# EAGLE board PCU_R2 (EAGLE 7.7.0)
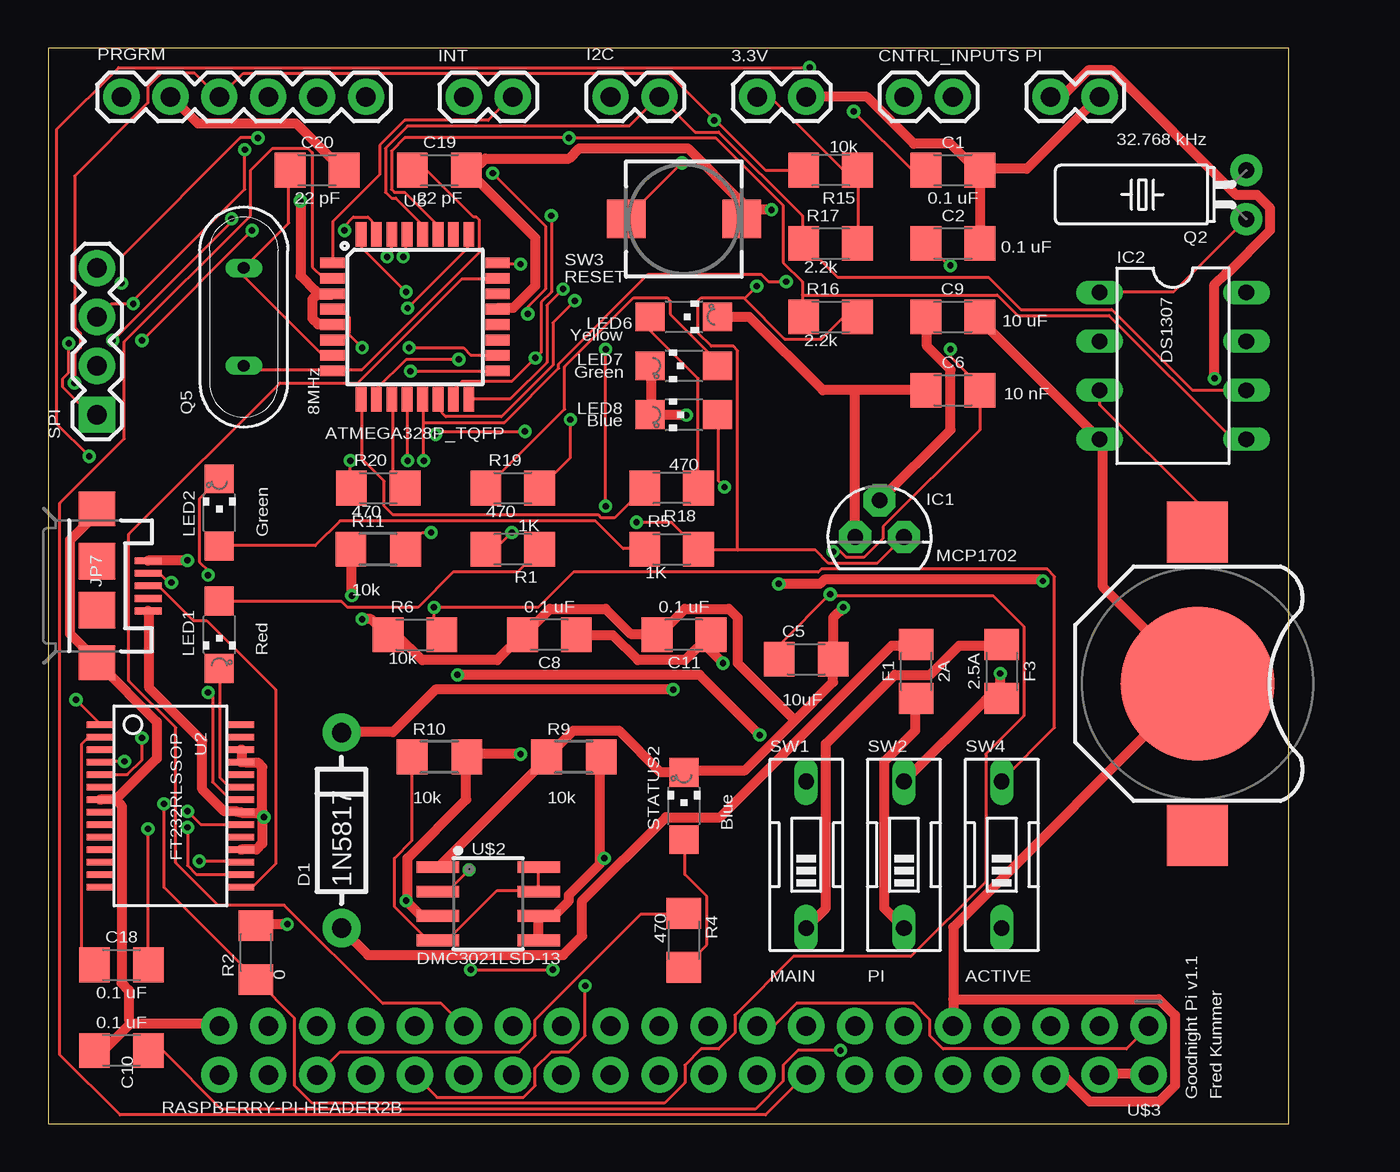
[diagram p0: board, top side]
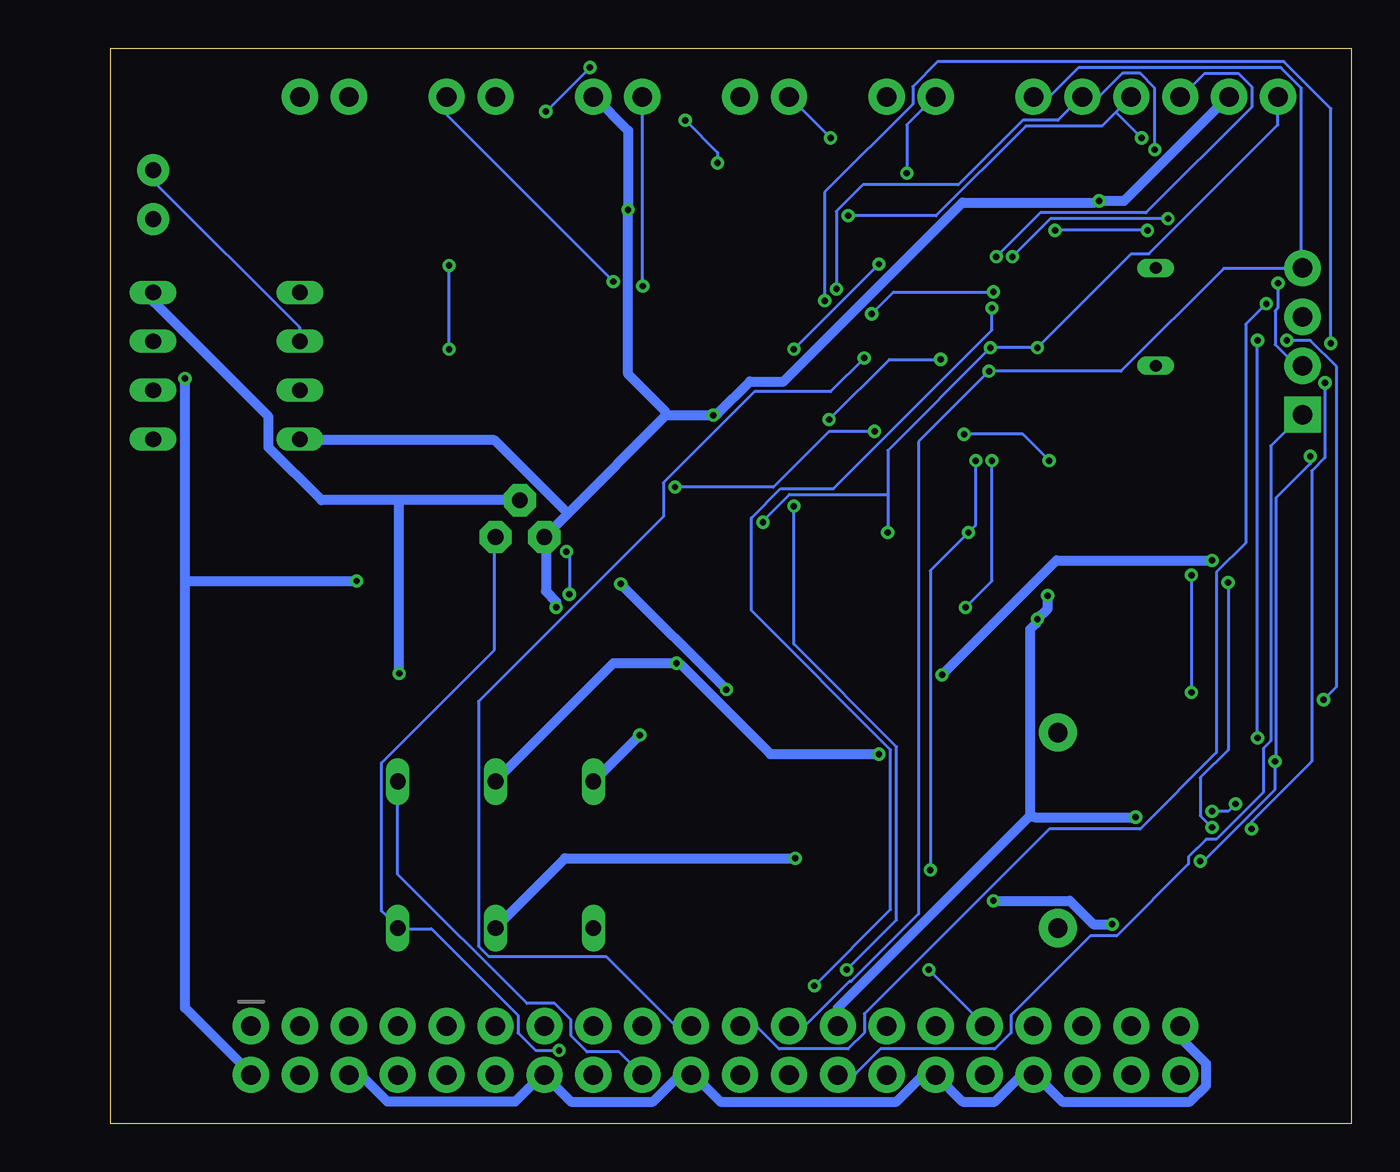
[diagram p1: board, bottom side, seen from below]

Size 64.44 x 55.87 mm. Coordinates in mm from the lower left corner, seen from the top.
Outline: 0,0 64.44,0 64.44,55.87 0,55.87 0,0
Copper layers (1*16): Top 0.0356mm / dielectric 1.5011mm / Bottom 0.0356mm
Design rules "LaenPCBOrder": minimum track width 6mil, minimum drill 13mil, track to track 6mil, track to pad 6mil, pad to pad 6mil, via to via 6mil, smd to smd 6mil, copper to edge 15mil, drill to drill 6mil, minimum pad ring 7mil, minimum via ring 7mil, stop-mask expansion 3mil, vias tented up to drill 0mil, thermal gap 10mil
Net classes: 1 actuator: width 0.813 mm, clearance 0.229 mm; 2 pi: width 0.508 mm

## Footprints (pad centres in the part's own frame; a part is rotated, then mirrored left to right if it is on the bottom)
1X02 = drill 1.016 pad 1.88: 1 0,0; 2 2.54,0
BATTCON_12MM = smd 8 x 8: GND 0,0 | smd 3.175 x 3.175: PWR@1 -7.874,0; PWR@2 7.874,0
1206 = smd 1.6 x 1.8: 1 -1.4,0; 2 1.4,0
C1206 = smd 1.6 x 1.8: 1 -1.4,0; 2 1.4,0
DIODE-1N4001 = drill 1 pad 1.981: A -5.08,0; C 5.08,0
TO92 = drill 0.813 pad 1.676 octagon: 1 -1.27,0; 2 0,1.905; 3 1.27,0
DIL08 = drill 0.813 long: 1 -3.81,-3.81; 2 -1.27,-3.81; 3 1.27,-3.81; 4 3.81,-3.81; 5 3.81,3.81; 6 1.27,3.81; 7 -1.27,3.81; 8 -3.81,3.81
1X04 = drill 1.016 pad 1.88 square: 1 0,0 | drill 1.016 pad 1.88: 2 2.54,0; 3 5.08,0; 4 7.62,0
1X06 = drill 1.016 pad 1.88: 1 0,0; 2 2.54,0; 3 5.08,0; 4 7.62,0; 5 10.16,0; 6 12.7,0
USB-MICROB = smd 0.35 x 1.4: D+ 0,2.65; D- -0.65,2.65; GND 1.3,2.65; ID 0.65,2.65; VBUS -1.3,2.65 | smd 1.8 x 1.9: MT1 -4,0; MT2 4,0 | smd 1.9 x 1.9: P$1 -1.27,0; P$2 1.27,0
CHIPLED_1206 = smd 1.5 x 1.5: A 0,-1.75; C 0,1.75
TC38H = drill 0.813 pad 1.676: 1 -1.27,0; 2 1.27,0
QS = drill 0.61 long: 1 -2.54,0; 2 2.54,0
R1206 = smd 1.6 x 1.803: 1 -1.422,0; 2 1.422,0
EDG-01 = drill 0.813 long: 1 0,-3.81; 2 0,3.81
PUSHBUTTON_SMD_SJ = smd 2 x 2: P$1 3,0; P$2 -3,0
SSOP28DB = smd 0.348 x 1.397: 1 -4.225,-3.656; 2 -3.575,-3.656; 3 -2.925,-3.656; 4 -2.275,-3.656; 5 -1.625,-3.656; 6 -0.975,-3.656; 7 -0.325,-3.656; 8 0.325,-3.656; 9 0.975,-3.656; 10 1.625,-3.656; 11 2.275,-3.656; 12 2.925,-3.656; 13 3.575,-3.656; 14 4.225,-3.656; 15 4.225,3.656; 16 3.575,3.656; 17 2.925,3.656; 18 2.275,3.656; 19 1.625,3.656; 20 0.975,3.656; 21 0.325,3.656; 22 -0.325,3.656; 23 -0.975,3.656; 24 -1.625,3.656; 25 -2.275,3.656; 26 -2.925,3.656; 27 -3.575,3.656; 28 -4.225,3.656
TQFP32-08 = smd 1.27 x 0.559: 1 -4.293,2.8; 2 -4.293,2; 3 -4.293,1.2; 4 -4.293,0.4; 5 -4.293,-0.4; 6 -4.293,-1.2; 7 -4.293,-2; 8 -4.293,-2.8; 17 4.293,-2.8; 18 4.293,-2; 19 4.293,-1.2; 20 4.293,-0.4; 21 4.293,0.4; 22 4.293,1.2; 23 4.293,2; 24 4.293,2.8 | smd 0.559 x 1.27: 9 -2.8,-4.293; 10 -2,-4.293; 11 -1.2,-4.293; 12 -0.4,-4.293; 13 0.4,-4.293; 14 1.2,-4.293; 15 2,-4.293; 16 2.8,-4.293; 25 2.8,4.293; 26 2,4.293; 27 1.2,4.293; 28 0.4,4.293; 29 -0.4,4.293; 30 -1.2,4.293; 31 -2,4.293; 32 -2.8,4.293
SOIC-8 = smd 0.61 x 2.21: 1 -1.905,-2.616; 2 -0.635,-2.616; 3 0.635,-2.616; 4 1.905,-2.616; 5 1.905,2.616; 6 0.635,2.616; 7 -0.635,2.616; 8 -1.905,2.616
2X20-NOSILK = drill 1.016 pad 1.88: 1 0,0; 2 0,2.54; 3 2.54,0; 4 2.54,2.54; 5 5.08,0; 6 5.08,2.54; 7 7.62,0; 8 7.62,2.54; 9 10.16,0; 10 10.16,2.54; 11 12.7,0; 12 12.7,2.54; 13 15.24,0; 14 15.24,2.54; 15 17.78,0; 16 17.78,2.54; 17 20.32,0; 18 20.32,2.54; 19 22.86,0; 20 22.86,2.54; 21 25.4,0; 22 25.4,2.54; 23 27.94,0; 24 27.94,2.54; 25 30.48,0; 26 30.48,2.54; 27 33.02,0; 28 33.02,2.54; 29 35.56,0; 30 35.56,2.54; 31 38.1,0; 32 38.1,2.54; 33 40.64,0; 34 40.64,2.54; 35 43.18,0; 36 43.18,2.54; 37 45.72,0; 38 45.72,2.54; 39 48.26,0; 40 48.26,2.54

## Placement (x,y rotation side)
3.3V  [1X02]  36.83,53.34 0 top
BAT1  [BATTCON_12MM]  59.69,22.86 270 top
C1  0.1 uF  [1206]  46.99,49.53 0 top
C2  0.1 uF  [1206]  46.99,45.72 0 top
C5  10uF  [C1206]  39.37,24.13 0 top
C6  10 nF  [1206]  46.99,38.1 0 top
C8  0.1 uF  [1206]  26.04,25.4 180 top
C9  10 uF  [C1206]  46.99,41.91 0 top
C10  0.1 uF  [1206]  3.81,3.81 180 top
C11  0.1 uF  [1206]  33.02,25.4 180 top
C18  0.1 uF  [1206]  3.81,8.26 0 top
C19  22 pF  [1206]  20.32,49.53 0 top
C20  22 pF  [1206]  13.97,49.53 0 top
CNTRL_INPUTS  [1X02]  44.45,53.34 0 top
D1  1N5817  [DIODE-1N4001]  15.24,15.24 90 top
F1  2A  [1206]  45.09,23.5 90 top
F3  2.5A  [1206]  49.53,23.5 270 top
IC1  MCP1702  [TO92]  43.18,30.48 0 top
IC2  DS1307  [DIL08]  58.42,39.37 270 top
INT  [1X02]  21.59,53.34 0 top
JP2  SPI  [1X04]  2.54,36.83 90 top
JP6  PRGRM  [1X06]  3.81,53.34 0 top
JP7  USB-MICROB  [USB-MICROB]  2.54,27.94 270 top
JP9  I2C  [1X02]  29.21,53.34 0 top
LED1  Red  [CHIPLED_1206]  8.89,25.4 180 top
LED2  Green  [CHIPLED_1206]  8.89,31.75 0 top
LED6  Green  [CHIPLED_1206]  33.02,41.91 270 top
LED7  Yellow  [CHIPLED_1206]  33.02,39.37 90 top
LED8  Blue  [CHIPLED_1206]  33.02,36.83 90 top
PI  [1X02]  52.07,53.34 0 top
Q2  32.768 kHz  [TC38H]  62.23,48.26 90 top
Q5  8MHz  [QS]  10.16,41.91 90 top
R1  1K  [1206]  24.13,29.84 180 top
R2  0  [1206]  10.79,8.89 90 top
R4  470  [1206]  33.02,9.53 270 top
R5  1K  [1206]  32.38,29.84 0 top
R6  10k  [1206]  19.05,25.4 0 top
R9  10k  [R1206]  27.3,19.05 0 top
R10  10k  [R1206]  20.32,19.05 0 top
R11  10k  [R1206]  17.14,29.84 0 top
R15  10k  [1206]  40.64,49.53 180 top
R16  2.2k  [1206]  40.64,41.91 0 top
R17  2.2k  [1206]  40.64,45.72 0 top
R18  470  [1206]  32.38,33.02 180 top
R19  470  [1206]  24.13,33.02 0 top
R20  470  [1206]  17.14,33.02 0 top
STATUS2  Blue  [CHIPLED_1206]  33.02,16.51 0 top
SW1  MAIN  [EDG-01]  39.37,13.97 0 top
SW2  PI  [EDG-01]  44.45,13.97 0 top
SW3  RESET  [PUSHBUTTON_SMD_SJ]  33.02,46.99 0 top
SW4  ACTIVE  [EDG-01]  49.53,13.97 0 top
U2  FT232RLSSOP  [SSOP28DB]  6.35,16.51 270 top
U5  ATMEGA328P_TQFP  [TQFP32-08]  19.05,41.91 0 top
U$2  DMC3021LSD-13  [SOIC-8]  22.86,11.43 270 top
U$3  RASPBERRY-PI-HEADER2B  [2X20-NOSILK]  57.15,5.08 180 top

## Library data of the parts
3.3V CNTRL_INPUTS INT JP2 JP9 PI = SparkFun-Connectors
BAT1 = SparkFun-Electromechanical; PROD_ID: BATT-08044
C1 C2 C6 C8 C10 C11 C18-C20 = SparkFun-Capacitors; PROD_ID: CAP-09822
C5 C9 IC1 IC2 LED1 LED2 LED6-LED8 R9-R11 STATUS2 SW3 = adafruit
D1 = SparkFun-DiscreteSemi
F1 F3 = SparkFun-Fuses; PROD_ID: RES-08585
JP6 = SparkFun-Connectors; PROD_ID: CONN-08437
JP7 = SparkFun-Connectors; PROD_ID: CONN-09505
Q2 = adafruit; OC_FARNELL: unknown; OC_NEWARK: unknown
Q5 SW1 SW2 SW4 = special
R1 R2 R5 = SparkFun-Resistors
R4 R6 R15-R20 = SparkFun-Passives
U2 = SparkFun
U5 = SparkFun-IC-Microcontroller; PROD_ID: IC-09069
U$2 U$3 = custom

## Nets
3.3V: 3.3V.1 C10.1 IC1.3 JP6.1 R1.2 R5.2 R15.1 R16.2 R17.2 SW4.1 U5.4 U5.6 U5.18
5V [pi]: C8.1 C9.1 C11.1 F3.2 IC1.2 IC2.8 R2.2 R10.2 SW2.2 U$2.3
5V_RAW [pi]: JP7.VBUS SW1.2
5V_SWITCH [pi]: F3.1 SW1.1
A0: U5.23 U$3.29
A1: U5.24 U$3.31
A2: U5.25 U$3.32
ACTIVE: R6.2 SW4.2 U5.12 U$3.18
ALIVE: U5.2 U$3.16
D+: JP7.D+ U2.15
D-: JP7.D- U2.16
DTR: C18.1 U2.2
FT232_VCC: C2.1 C5.1 C6.2 R2.1 U2.20
FUSE_DIODE_PI [pi]: D1.A F1.2
GND-ISO [pi]: 3.3V.2 BAT1.GND C1.2 C2.2 C5.2 C6.1 C8.2 C9.2 C10.2 C11.2 C19.2 C20.2 IC1.1 IC2.4 JP6.2 JP7.GND JP7.MT1 JP7.MT2 LED6.C LED7.C LED8.C PI.2 R6.1 R9.1 R11.1 STATUS2.C SW3.P$1 U2.7 U2.18 U2.21 U2.25 U2.26 U5.3 U5.5 U5.21 U$2.1 U$3.6 U$3.9 U$3.14 U$3.20 U$3.25 U$3.30 U$3.34 U$3.39
GP16: R4.1 U$3.36
INT0: INT.1 U5.32
INT1: INT.2 U5.1
MISO: JP2.3 JP6.5 U5.16 U$3.21
MOSI: JP2.2 JP6.4 U5.15 U$3.19
N$1: LED1.A R1.1
N$2: LED2.A R5.1
N$3: IC2.1 Q2.1
N$4: IC2.2 Q2.2
N$5: BAT1.PWR@1 IC2.3
N$10: R4.2 STATUS2.A
N$25: LED6.A R18.1
N$26: LED7.A R19.1
N$27: LED8.A R20.1
PD5: R18.2 U5.9
PD6: R19.2 U5.10
PD7: R20.2 U5.11
PI_3.3V: U$3.1 U$3.17
PI_5V [pi]: D1.C PI.1 U$3.2 U$3.4
PI_N_DRAIN: R10.1 U$2.4 U$2.7 U$2.8
PI_P_DRAIN [pi]: F1.1 R9.2 SW2.1 U$2.5 U$2.6
PI_PWR_CNTRL: CNTRL_INPUTS.2 R11.2 U5.13 U$2.2
RESET: C18.2 JP6.3 R15.2 SW3.P$2 U5.29
RXI: U2.5 U5.31
RXLED: LED2.C U2.22
SCL: IC2.6 JP9.2 R17.1 U5.28
SCLK: JP2.4 JP6.6 U5.17 U$3.23
SDA: IC2.5 JP9.1 R16.1 U5.27
SS: JP2.1 U5.14 U$3.26
TXLED: LED1.C U2.23
TXO: U2.1 U5.30
VCCIO: C1.1 U2.4 U2.17
XTAL1: C20.1 Q5.2 U5.7
XTAL2: C19.1 Q5.1 U5.8

## Tracks (layer width: path | path; a pad name or v marks a point on that pad's centre or on a via)
3.3V  (via drill 0.33)
  Top 0.152: 15.58,41.03 15.62,41.07 15.62,41.91 15.24,42.29 14.78,42.29 U5.4 | 15.58,41.03 15.32,40.77 14.78,40.77 U5.6 | v18.75,40.31 21.57,40.31 21.95,39.93 23.32,39.93 U5.18 | 15.58,41.03 v16.31,40.31 | v24.08,30.71 23.24,29.87 22.78,29.87 R1.2 | R17.2 42.06,45.72 42.06,49.53 R15.1 41.3,49.53 37.49,53.34 3.3V.1 | 35.81,29.79 39.85,29.79 40.54,29.11 43.05,29.11 44.42,30.48 IC1.3 | 35.81,29.79 33.83,29.79 R5.2 33.76,29.87 32.38,31.24 v30.56,31.24 | R16.2 41.3,41.91 40.16,40.77 38.25,40.77 36.16,42.86 | 36.16,42.86 36.12,42.9 33.91,42.9 33.76,42.75 33.76,41.07 34.44,40.39 35.59,40.39 35.81,40.16 35.81,29.79 | 36.16,42.86 v36.8,43.51 | C10.1 5.94,3.81 8.99,0.76 36.73,0.76 38.18,2.21 38.18,3.05 38.94,3.81 v41.15,3.81
  Bottom 0.152: 24.08,32.69 24.08,34.98 v18.75,40.31 v16.31,40.31 11.43,45.19 10.52,45.19 3.81,51.89 JP6.1 | 24.08,32.69 v24.08,30.71 | v36.8,43.51 36.8,53.34 3.3V.1 | v41.15,3.81 42.37,3.81 43.28,4.72 43.28,5.64 47.78,10.13 49.53,10.13 SW4.1 49.53,10.21 50.37,11.05 50.37,18.75 44.5,24.61 44.5,30.48 IC1.3 | 24.08,32.69 29.18,32.69 30.56,31.32 v30.56,31.24
5V  (via drill 0.33)
  Top 0.508: C9.1 45.64,41.91 45.64,40.39 46.86,39.17 46.86,36.04 43.2,32.38 IC1.2 | v12.42,10.36 10.82,10.36 R2.2 | U$2.3 20.19,10.82 19.36,10.82 v18.59,11.58 18.67,11.81 18.67,13.79 21.72,16.84 21.72,19.05 R10.2 21.95,19.2 v24.54,19.2 | C8.1 27.51,25.38 29.34,25.38 30.63,24.08 33.07,24.08 34.37,25.38 C11.1 34.14,24.84 v35.05,23.93 | SW2.2 48.69,22.02 49.53,22.02 F3.2 49.45,22.33 v49.45,23.39
  Bottom 0.508: IC1.2 49.45,32.38 | 49.45,32.38 53.49,32.38 56.24,35.13 56.24,36.73 62.18,42.67 62.18,43.13 IC2.8 | v12.42,10.36 13.41,10.36 14.63,11.58 v18.59,11.58 | SW2.2 44.42,17.83 38.33,23.93 v35.05,23.93 34.82,23.85 30.18,19.2 v24.54,19.2 | v49.45,23.39 49.45,32.38
5V_RAW  (via drill 0.33)
  Top 0.508: v7.24,29.26 5.26,29.26 JP7.VBUS | v21.26,23.32 33.83,23.32 v36.96,20.19
  Bottom 0.508: v7.24,29.26 15.32,29.26 v21.26,23.32 | SW1.2 v36.96,20.19
5V_SWITCH
  Top 0.508: F3.1 49.53,24.84 47.32,24.84 45.8,23.32 43.97,23.32 40.39,19.74 40.39,11.2 39.4,10.21 SW1.1
A0
  Top 0.152: U$3.29 20.42,6.25 17.37,6.25 12.27,11.35 8.84,11.35 6.63,13.56 6.63,20.57 4.19,23.01 4.19,30.63 12.04,38.48 16.08,38.48 21.49,43.89 23.32,43.89 U5.23
A1  (via drill 0.33)
  Top 0.152: v24.54,44.65 23.39,44.65 U5.24 | v28.96,32.08 v28.96,40.23 | v21.95,8 v26.21,8
  Bottom 0.152: v28.96,40.23 v24.54,44.65 | v28.96,32.08 28.96,24.92 23.62,19.58 23.62,10.59 v26.21,8 | v21.95,8 19.05,5.11 U$3.31
A2  (via drill 0.33)
  Top 0.152: v18.67,42.37 21.79,45.49 21.79,46.18 U5.25 | v27.89,7.16 27.89,4.57 27.05,3.73 26.14,3.73 25.3,2.9 25.3,1.98 24.69,1.37 20.19,1.37 19.05,2.52 U$3.32
  Bottom 0.152: v18.67,42.37 18.67,41.22 26.9,32.99 29.64,32.99 31.17,31.47 31.17,26.67 23.93,19.43 23.93,11.12 v27.89,7.16
ACTIVE  (via drill 0.33)
  Top 0.152: v18.67,34.44 18.67,37.57 U5.12 | R6.2 20.42,25.45 20.04,25.83 v20.04,26.82 25.45,26.82 27.28,28.65 40.01,28.65 40.16,28.8 51.89,28.8 52.27,28.42 52.27,20.57 49.53,17.83 SW4.2
  Bottom 0.152: v18.67,34.44 18.67,28.19 v20.04,26.82 | SW4.2 49.53,12.95 42.82,6.25 41.38,6.25 40.54,5.41 40.54,4.57 39.7,3.73 38.02,3.73 U$3.18
ALIVE
  Top 0.152: U5.2 14.71,43.97 14.25,43.97 13.72,44.5 13.72,50.44 13.49,50.67 11.66,50.67 10.52,49.53 10.52,47.17 3.96,40.62 3.96,35.59 0.61,32.23 0.61,3.58 3.73,0.46 37.26,0.46 39.32,2.52 U$3.16
D+
  Top 0.152: U2.15 10.06,12.34 10.67,12.34 11.81,13.49 11.81,22.55 8.23,26.14 7.54,26.14 5.79,27.89 5.26,27.89 JP7.D+
D-  (via drill 0.33)
  Top 0.152: v7.24,15.39 7.24,13.41 7.7,12.95 9.98,12.95 U2.16 | v6.4,28.12 6.25,28.12 5.79,28.57 5.26,28.57 JP7.D-
  Bottom 0.152: v7.24,15.39 7.85,16 7.85,17.98 6.4,19.43 v6.4,28.12
DTR
  Top 0.152: U2.2 2.67,20.04 2.06,20.04 1.75,19.74 1.75,8.91 2.36,8.31 C18.1
FT232_VCC  (via drill 0.33)
  Top 0.152: v7.24,16.23 7.92,15.54 9.98,15.54 U2.20 | v6.02,16.61 6.02,12.27 10.74,7.54 R2.1 10.82,7.47 12.8,5.49 12.8,1.98 13.72,1.07 32,1.07 33.07,2.13 33.07,3.05 33.91,3.89 34.82,3.89 35.66,4.72 35.66,5.64 38.71,8.69 44.81,8.69 48.69,12.57 48.69,19.2 50.67,21.18 50.67,25.83 49.07,27.43 40.62,27.43 v40.62,27.51 38.02,24.92 38.02,24.16 C5.1 | v40.77,29.72 41.15,29.72 41.45,29.41 42.37,29.41 43.36,30.4 43.36,31.01 48.39,36.04 C6.2 | v46.86,44.58 46.79,44.58 45.64,45.72 C2.1 | v46.86,40.23 46.86,39.85 48.39,38.33 C6.2 | C6.2
  Bottom 0.152: v7.24,16.23 6.4,16.23 v6.02,16.61 | v40.62,27.51 40.62,29.57 v40.77,29.72 | v46.86,40.23 v46.86,44.58
FUSE_DIODE_PI
  Top 0.508: F1.2 45.03,24.84 43.81,24.84 34.9,15.93 32.08,15.93 27.74,11.58 27.74,9.75 26.75,8.76 16.61,8.76 15.24,10.13 D1.A
GND-ISO  (via drill 0.33)
  Top 0.508: C10.2 2.9,3.81 4.27,5.18 | 4.27,5.18 8.76,5.18 8.84,5.11 U$3.39 | 3.5,16.84 2.74,16.84 U2.7 | 3.5,16.84 5.64,18.97 5.64,20.88 2.59,23.93 JP7.MT2 2.44,24.16 1.14,25.45 1.14,30.33 2.52,31.7 2.52,31.93 JP7.MT1 | 4.27,5.18 4.19,5.41 4.19,6.93 3.81,7.32 3.81,16.54 3.5,16.84 | 38.79,20.95 36.2,18.36 33.22,18.36 STATUS2.C 32.99,18.29 31.77,18.29 29.64,20.42 27.28,20.42 25.91,19.05 R9.1 25.76,18.82 20.27,13.34 U$2.1 | 38.79,20.95 40.77,22.94 40.77,24.08 C5.2 40.77,24.38 40.77,26.29 v41.3,26.82 | U2.26 10.06,19.43 10.06,18.82 U2.25 10.29,18.75 10.9,18.75 11.12,18.52 11.12,16.23 10.97,16.08 | 11.12,15.93 11.12,14.55 10.82,14.25 10.06,14.25 U2.18 | 10.97,16.08 10.9,16.15 10.06,16.15 U2.21 9.75,16.23 9.14,16.23 8,17.37 8,19.89 5.26,22.63 5.26,26.59 JP7.GND | 10.97,16.08 11.12,15.93 | v15.77,27.43 15.77,29.79 R11.1 | v16.31,26.21 16.76,26.21 17.45,25.53 R6.1 17.68,25.38 18.14,25.38 19.43,24.08 23.32,24.08 24.61,25.38 C8.2 24.84,25.53 26.06,26.75 28.96,26.75 30.25,25.45 31.55,25.45 C11.2 31.85,25.53 33.07,26.75 35.36,26.75 35.81,26.29 35.81,23.93 38.79,20.95 | v11.2,15.93 11.12,15.93 | C9.2 48.46,41.91 48.46,41.68 54.56,35.59 IC2.4 54.79,35.36 54.79,27.89 59.59,23.09 BAT1.GND 59.66,22.86 47.02,10.21 47.02,6.48 | 47.02,6.48 47.02,5.11 U$3.9 | U5.21 23.39,42.37 24.16,42.37 25.3,43.51 25.3,46.02 21.79,49.53 C19.2 22.1,49.53 22.71,50.14 27.05,50.14 27.58,50.67 33.22,50.67 35.97,47.93 35.97,47.02 SW3.P$1 36.2,47.47 v37.57,47.47 | C2.2 C1.2 | C1.2 48.62,49.61 50.83,49.61 54.56,53.34 PI.2 | 3.3V.2 42.52,53.34 44.96,50.9 46.86,50.9 48.16,49.61 C1.2 | 13.95,43.05 13.72,42.82 13.72,41.83 14.02,41.53 14.71,41.53 U5.5
  Top 0.508: 13.95,43.05 14.71,43.05 U5.3 | C20.2 15.32,49.53 12.88,51.97 7.77,51.97 6.4,53.34 JP6.2 | v13.11,47.93 13.11,44.04 13.87,43.28 13.95,43.05 | LED6.C 36.42,41.91 40.23,38.1 41.91,38.1 | C6.1 41.91,38.1 | LED7.C 31.32,39.32 31.32,36.88 LED8.C 31.55,36.8 v33.15,36.8 | IC1.1 41.91,38.1 | 47.02,6.48 57.68,6.48 58.52,5.64 58.52,1.98 57.68,1.14 54.1,1.14 52.73,2.52 52.12,2.52 U$3.6
  Bottom 0.508: U$3.6 52.05,2.52 51.44,2.52 50.06,1.14 43.43,1.14 42.14,2.44 U$3.14 41.91,2.52 40.54,1.14 36.27,1.14 34.9,2.52 34.29,2.52 U$3.20 34.06,2.44 32.77,1.14 23.62,1.14 22.33,2.44 21.79,2.44 U$3.30 20.19,1.14 18.52,1.14 17.14,2.52 16.54,2.52 U$3.34 16.31,2.44 15.01,1.14 8.38,1.14 7.54,1.98 7.54,3.12 8.84,4.42 8.84,5.03 U$3.39 | v15.77,27.43 15.77,26.75 v16.31,26.21 16.38,25.98 16.69,25.68 16.69,16 | U$3.25 26.67,6.02 16.69,16 | v11.2,15.93 16.46,15.93 16.69,16 | 3.3V.2 39.32,53.34 37.57,51.59 v37.57,47.47 37.57,38.94 35.66,37.03 35.59,36.8 | JP6.2 6.4,53.34 11.81,47.93 v13.11,47.93 13.34,47.85 20.19,47.85 29.49,38.56 31.24,38.56 32.92,36.88 v33.15,36.8 35.59,36.8 | 40.69,31.7 IC1.1 41.83,30.25 41.83,27.66 41.3,27.13 v41.3,26.82 | 40.69,31.7 35.59,36.8 | 40.69,31.7 44.5,35.51 54.56,35.51 IC2.4
GP16
  Top 0.152: U$3.36 15.16,3.73 24.46,3.73 25.3,4.57 25.3,5.41 30.79,10.9 32.99,10.9 R4.1
INT0  (via drill 0.33)
  Top 0.152: v18.59,43.2 16.31,45.49 16.31,46.18 U5.32 | v24.92,42.06 24.92,42.44 25.83,43.36 25.83,46.63 v23.09,49.38
  Bottom 0.152: v18.59,43.2 23.77,43.2 v24.92,42.06 | v23.09,49.38 23.09,51.89 21.64,53.34 INT.1
INT1
  Top 0.152: U5.1 14.78,44.73 14.78,46.86 17.22,49.3 17.22,50.83 18.52,52.12 22.86,52.12 24.08,53.34 INT.2
MISO  (via drill 0.33)
  Top 0.152: v26.75,43.36 25.91,42.52 25.91,39.55 24,37.64 21.87,37.64 U5.16 | 4.27,42.6 3.28,42.6 2.59,41.91 JP2.3 | v10.21,50.6 10.21,48.54 4.27,42.6 | 4.27,42.6 v4.42,42.6
  Bottom 0.152: v26.75,43.36 26.75,47.4 25.38,48.77 20.42,48.77 17.07,52.12 15.24,52.12 14.02,53.34 JP6.5 13.11,53.34 11.89,54.56 10.97,54.56 10.21,53.8 v10.21,50.6 | v4.42,42.6 5.49,41.53 5.49,30.18 7.01,28.65 7.01,19.28 10.97,15.32 15.7,15.32 25.3,5.71 25.3,4.72 26.14,3.89 29.72,3.89 30.86,5.03 31.7,5.03 U$3.21
MOSI  (via drill 0.33)
  Top 0.152: v26.14,47.17 26.14,43.2 25.6,42.67 25.6,40.08 v25.3,39.78 24.08,38.56 21.49,38.56 21.11,38.18 21.11,37.64 U5.15 | v3.81,43.66 3.81,45.03 9.98,51.21 v10.9,51.21
  Bottom 0.152: v26.14,47.17 21.57,47.17 16.92,51.82 12.95,51.82 12.23,52.54 | JP6.4 12.23,52.54 | v25.3,39.78 27.05,38.02 31.01,38.02 35.74,33.3 35.74,31.55 45.34,21.95 45.34,9.22 44.81,8.69 38.71,8.69 35.13,5.11 34.29,5.11 U$3.19 | v3.81,43.66 3.81,42.37 3.96,42.22 3.96,40.46 2.9,39.4 2.59,39.4 JP2.2 | 12.23,52.54 v10.9,51.21
N$1
  Top 0.152: LED1.A 8.91,27.13 15.24,27.13 15.54,26.82 19.2,26.82 21.03,28.65 24.38,28.65 25.53,29.79 R1.1
N$2
  Top 0.152: LED2.A 8.91,30.02 13.87,30.02 15.16,31.32 28.42,31.32 29.87,29.87 30.94,29.87 R5.1
N$3
  Top 0.152: Q2.1 58.45,43.2 54.63,43.2 IC2.1
N$4
  Bottom 0.152: IC2.2 54.63,40.69 54.63,41.38 62.18,48.92 62.18,49.53 Q2.2
N$5
  Top 0.152: IC2.3 54.63,38.1 54.63,37.34 59.66,32.31 59.66,30.79 BAT1.PWR@1
N$10
  Top 0.152: STATUS2.A 33.07,14.71 33.07,12.95 34.21,11.81 34.21,9.3 33.07,8.15 R4.2
N$25
  Top 0.152: LED6.A 31.32,41.91 31.32,41.15 33.76,38.71 33.76,33.07 R18.1
N$26
  Top 0.152: LED7.A 34.75,39.4 34.75,39.62 32.31,42.06 32.31,42.75 32.16,42.9 30.4,42.9 26.82,39.32 26.82,37.11 22.78,33.07 R19.1
N$27  (via drill 0.33)
  Top 0.152: v35.13,33.07 34.82,33.38 34.82,36.8 LED8.A | v24.77,35.97 20.27,35.97 v20.12,35.81 | v15.7,34.44 15.7,33.07 R20.1
  Bottom 0.152: v35.13,33.07 30.02,33.07 27.13,35.97 v24.77,35.97 | v20.12,35.81 17.07,35.81 v15.7,34.44
PD5
  Top 0.152: U5.9 16.31,37.57 16.31,34.52 17.45,33.38 17.45,32.08 17.91,31.62 28.57,31.62 28.73,31.47 29.41,31.47 30.94,32.99 R18.2
PD6  (via drill 0.33)
  Top 0.152: v21.34,39.7 18.59,39.7 17.07,38.18 17.07,37.64 U5.10 | v27.13,36.58 27.13,34.59 25.6,33.07 R19.2
  Bottom 0.152: v21.34,39.7 24,39.7 v27.13,36.58
PD7
  Top 0.152: U5.11 17.91,37.57 17.91,33.68 18.52,33.07 R20.2
PI_3.3V
  Top 0.152: U$3.17 36.88,5.11 37.72,5.11 38.86,6.25 44.96,6.25 45.8,5.41 45.8,4.57 46.48,3.89 56.01,3.89 57.15,5.03 U$3.1
PI_5V  (via drill 0.33)
  Top 0.508: U$3.4 54.63,2.59 57.15,2.59 U$3.2 | PI.1 52.65,53.34 54.03,54.71 55.24,54.71 61.72,48.23 62.79,48.23 63.48,47.55 63.48,46.41 61.27,44.2 61.19,44.2 60.58,43.59 v60.58,38.71 | v32.46,22.55 20.12,22.55 17.91,20.34 15.24,20.34 D1.C | v37.95,28.04 40.08,28.04 40.31,28.27 51.59,28.27 v51.66,28.19
  Bottom 0.508: 60.58,28.19 60.58,6.02 57.15,2.59 U$3.2 | 60.58,28.19 v60.58,38.71 | v37.95,28.04 v32.46,22.55 | 60.58,28.19 v51.66,28.19
PI_N_DRAIN
  Top 0.152: U$2.8 25.45,13.34 25.45,12.12 U$2.7 25.38,12.12 23.32,12.12 20.73,9.53 U$2.4 19.74,9.53 17.98,11.28 17.98,13.79 18.9,14.71 R10.1 | R10.1
PI_P_DRAIN  (via drill 0.33)
  Top 0.508: 28.65,13.79 28.65,13.49 27.05,11.89 27.05,11.58 26.29,10.82 25.53,10.82 U$2.6 25.45,10.59 25.45,9.53 U$2.5 | 28.65,13.79 28.65,19.05 R9.2 | F1.1 45.03,22.02 45.03,20.42 43.43,18.82 43.43,11.2 44.42,10.21 SW2.1 | v28.88,13.79 28.65,13.79
  Bottom 0.508: v28.88,13.79 40.84,13.79 44.42,10.21 SW2.1
PI_PWR_CNTRL  (via drill 0.33)
  Top 0.152: v19.51,34.44 19.51,36.42 | 19.51,36.42 19.51,37.57 U5.13 | v19.89,30.71 19.43,30.71 18.59,29.87 R11.2 | v21.87,13.18 20.8,12.12 20.27,12.12 U$2.2 | v38.33,43.74 37.41,43.74 37.03,44.12 31.17,44.12 26.52,39.47 26.52,39.24 23.7,36.42 19.51,36.42
  Bottom 0.152: v19.51,34.44 19.51,31.09 v19.89,30.71 21.87,28.73 v21.87,13.18 | v38.33,43.74 46.94,52.35 46.94,53.34 CNTRL_INPUTS.2
RESET  (via drill 0.33)
  Top 0.152: v18.44,45.03 18.59,45.19 18.59,46.18 U5.29 | v5.18,15.32 5.18,8.31 C18.2 | v1.37,38.48 1.37,40.01 1.68,40.31 1.68,41.07 1.37,41.38 1.37,49.23 5.18,53.03 5.18,53.87 5.87,54.56 7.62,54.56 8.84,53.34 JP6.3 8.91,53.34 10.13,54.56 32.23,54.56 34.63,52.16 | R15.2 37.26,49.53 34.63,52.16 | v32.92,49.91 30.02,47.02 SW3.P$2 | v34.59,52.12 34.63,52.16
  Bottom 0.152: v18.44,45.03 16.15,47.32 10.67,47.32 5.18,52.81 5.18,53.87 5.87,54.56 7.62,54.56 8.84,53.34 JP6.3 | v5.18,15.32 5.18,15.7 2.06,18.82 2.06,33.91 1.37,34.59 v1.37,38.48 | v32.92,49.91 32.92,50.44 v34.59,52.12
RXI  (via drill 0.33)
  Top 0.152: v15.39,46.41 15.39,46.63 15.85,47.09 16.61,47.09 16.99,46.71 16.99,46.25 U5.31 | v4.88,40.69 v10.59,46.41 | v4.88,20.04 4.88,18.9 4.12,18.14 2.74,18.14 U2.5
  Bottom 0.152: v10.59,46.41 v15.39,46.41 | v4.88,20.04 v4.88,40.69
RXLED  (via drill 0.33)
  Top 0.152: v8.31,22.4 8.53,22.17 8.53,17.75 9.45,16.84 9.98,16.84 U2.22 | v8.31,28.5 8.31,28.73 7.85,29.18 7.85,32.46 8.84,33.45 LED2.C
  Bottom 0.152: v8.31,28.5 v8.31,22.4
SCL
  Top 0.152: U5.28 19.43,46.25 19.43,46.71 18.06,48.08 17.83,48.08 17.53,48.39 17.53,50.67 18.67,51.82 30.18,51.82 31.7,53.34 JP9.2 31.77,53.34 33.6,51.51 34.82,51.51 39.17,47.17 39.17,45.72 R17.1 41,43.97 48.84,43.97 50.52,42.29 55.24,42.29 59.44,38.1 IC2.6
SCLK  (via drill 0.33)
  Top 0.152: v18.82,39.09 23.32,39.09 U5.17
  Bottom 0.152: U$3.23 29.18,5.11 28.35,5.11 26.06,7.39 25.98,7.39 22.48,10.9 22.48,35.43 v18.82,39.09 11.96,39.09 6.63,44.42 2.59,44.42 JP2.4 2.59,44.5 2.59,53.8 3.66,54.86 14.17,54.86 15.7,53.34 JP6.6
SDA  (via drill 0.33)
  Top 0.152: U5.27 20.19,46.25 20.19,46.71 18.52,48.39 17.98,48.39 17.83,48.54 17.83,50.52 18.52,51.21 v27.05,51.21 34.67,51.21 38.18,47.7 38.18,44.73 39.17,43.74 39.17,43.05 | 39.17,43.05 39.17,41.91 R16.1 | 39.17,43.05 49.3,43.05 50.37,41.99 55.09,41.99 61.49,35.59 62.18,35.59 IC2.5
  Bottom 0.152: v27.05,51.21 29.18,53.34 JP9.1
SS  (via drill 0.33)
  Top 0.152: v27.36,42.75 26.21,41.6 26.21,39.4 23.55,36.73 20.65,36.73 20.27,37.11 20.27,37.57 U5.14 | v1.07,40.54 1.07,39.01 0.76,38.71 0.76,38.25 2.13,36.88 2.52,36.88 JP2.1
  Bottom 0.152: v27.36,42.75 27.36,48.39 22.78,52.96 22.78,53.87 21.49,55.17 3.5,55.17 1.07,52.73 v1.07,40.54 | U$3.26 26.67,2.59 25.76,2.59 24.46,3.89 18.52,3.89 17.68,4.72 17.68,5.64 13.56,9.75 12.19,9.75 8.46,13.49 8.46,13.87 7.54,14.78 7.01,14.78 4.57,17.22 4.57,19.51 4.19,19.89 4.19,35.2 2.59,36.8 JP2.1
TXLED
  Top 0.152: U2.23 9.98,17.53 9.37,17.53 8.91,17.98 8.91,23.62 LED1.C
TXO  (via drill 0.33)
  Top 0.152: v17.6,45.03 17.83,45.26 17.83,46.18 U5.30 | v9.53,47.02 9.53,46.86 v3.35,40.69 | v1.45,22.02 2.67,20.8 U2.1
  Bottom 0.152: v17.6,45.03 15.62,47.02 v9.53,47.02 | v3.35,40.69 2.13,40.69 0.76,39.32 0.76,22.71 v1.45,22.02
VCCIO  (via drill 0.33)
  Top 0.152: v3.96,18.82 2.74,18.82 U2.4 | v7.85,13.64 9.98,13.64 U2.17 | C1.1 44.88,49.53 v41.83,52.58 | v39.55,54.86 3.66,54.86 0.46,51.66 0.46,36.35 v2.13,34.67
  Bottom 0.152: v7.85,13.64 7.7,13.64 3.96,17.37 v3.96,18.82 3.89,18.9 3.89,32.54 2.13,34.29 v2.13,34.67 | v39.55,54.86 v41.83,52.58
XTAL1
  Top 0.152: U5.7 14.71,39.93 14.25,39.93 10.21,43.97 10.21,44.42 Q5.2 12.5,46.79 12.5,49.53 C20.1
XTAL2
  Top 0.152: Q5.1 10.36,39.17 14.71,39.17 U5.8 14.78,39.17 16.31,39.17 22.4,45.26 22.4,46.94 22.25,47.09 22.1,47.09 19.66,49.53 C19.1

## Text on the board
tNames: Goodnight Pi v1.1 | Fred Kummer